# Altium PCB DiPho_AFE.PcbDoc (part 1 of 2)
Units mm, origin at the board's own origin, x right, y up, seen from the top; angles counter-clockwise.
Board outline 25.2 x 25.2 mm, 4 copper layers (Top Layer, Inner Layer 1, Inner Layer 2, Bottom Layer), stack 1.51 mm thick; 66 components, 49 nets, 237 pads, 102 vias.
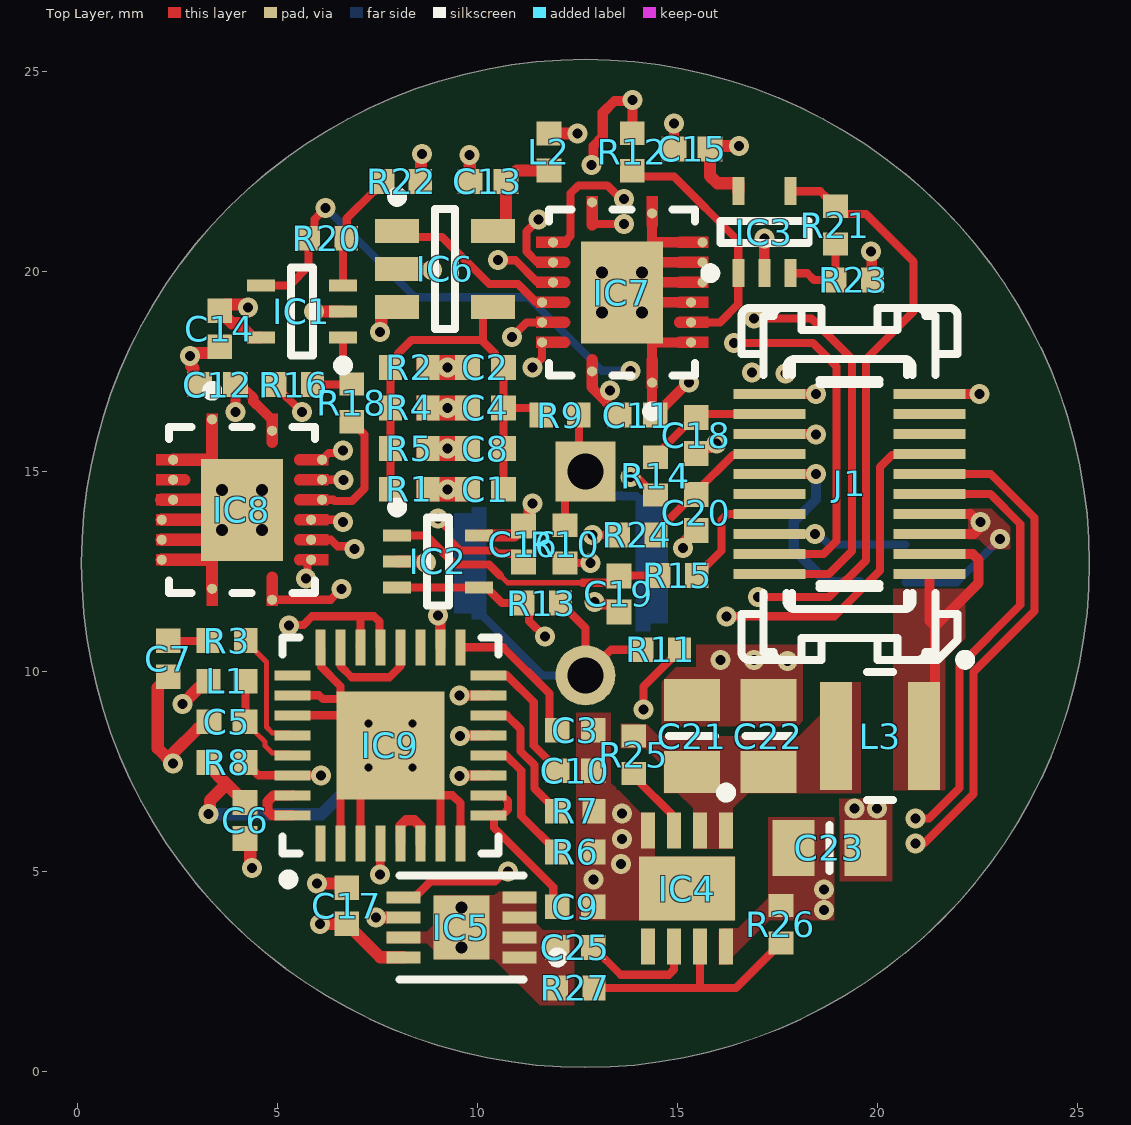
[diagram p0: Top Layer view]
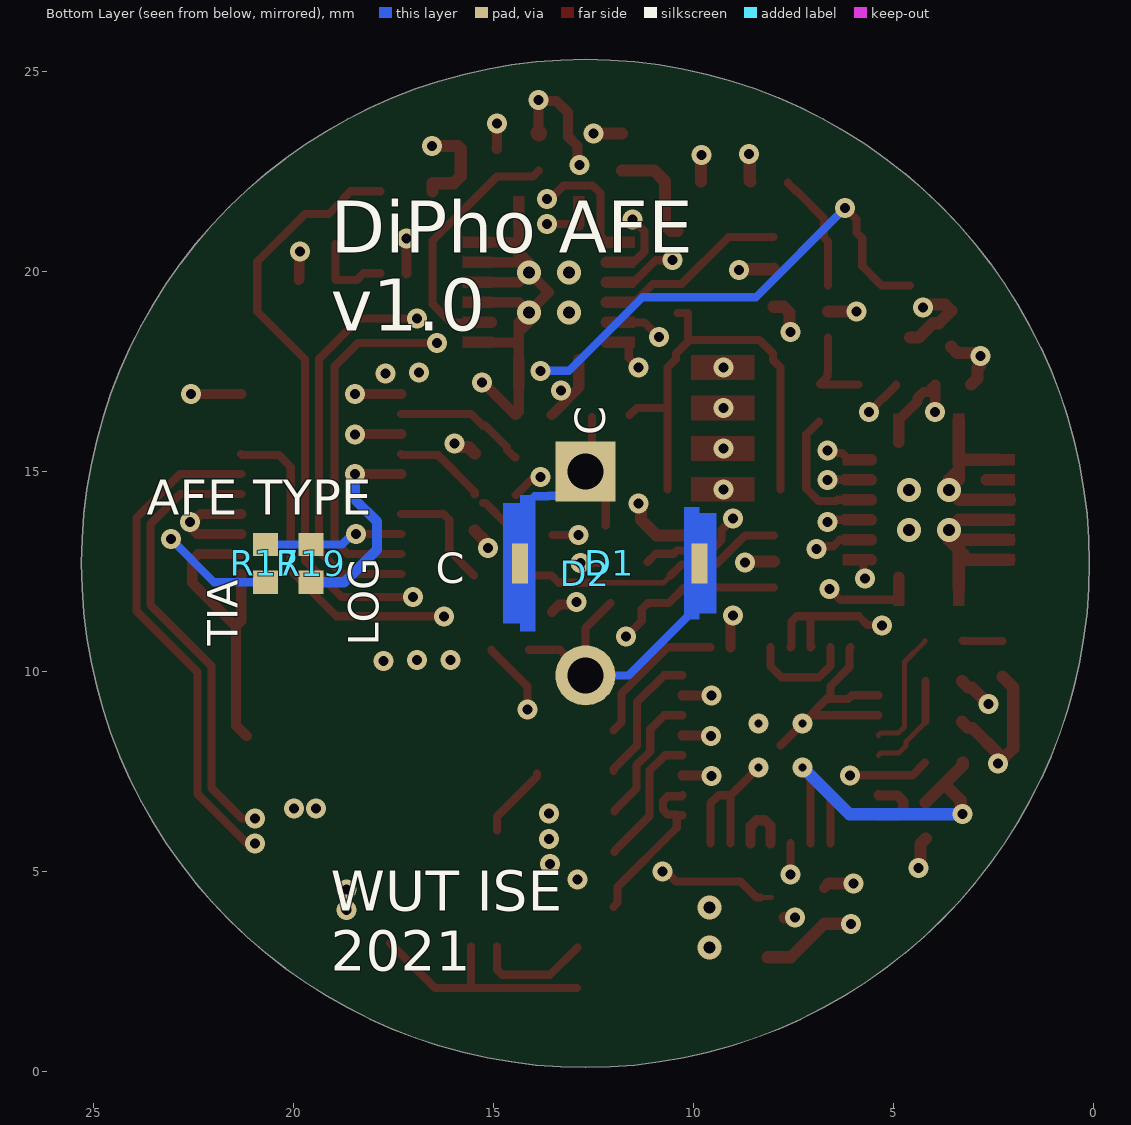
[diagram p1: Bottom Layer view, seen from below]
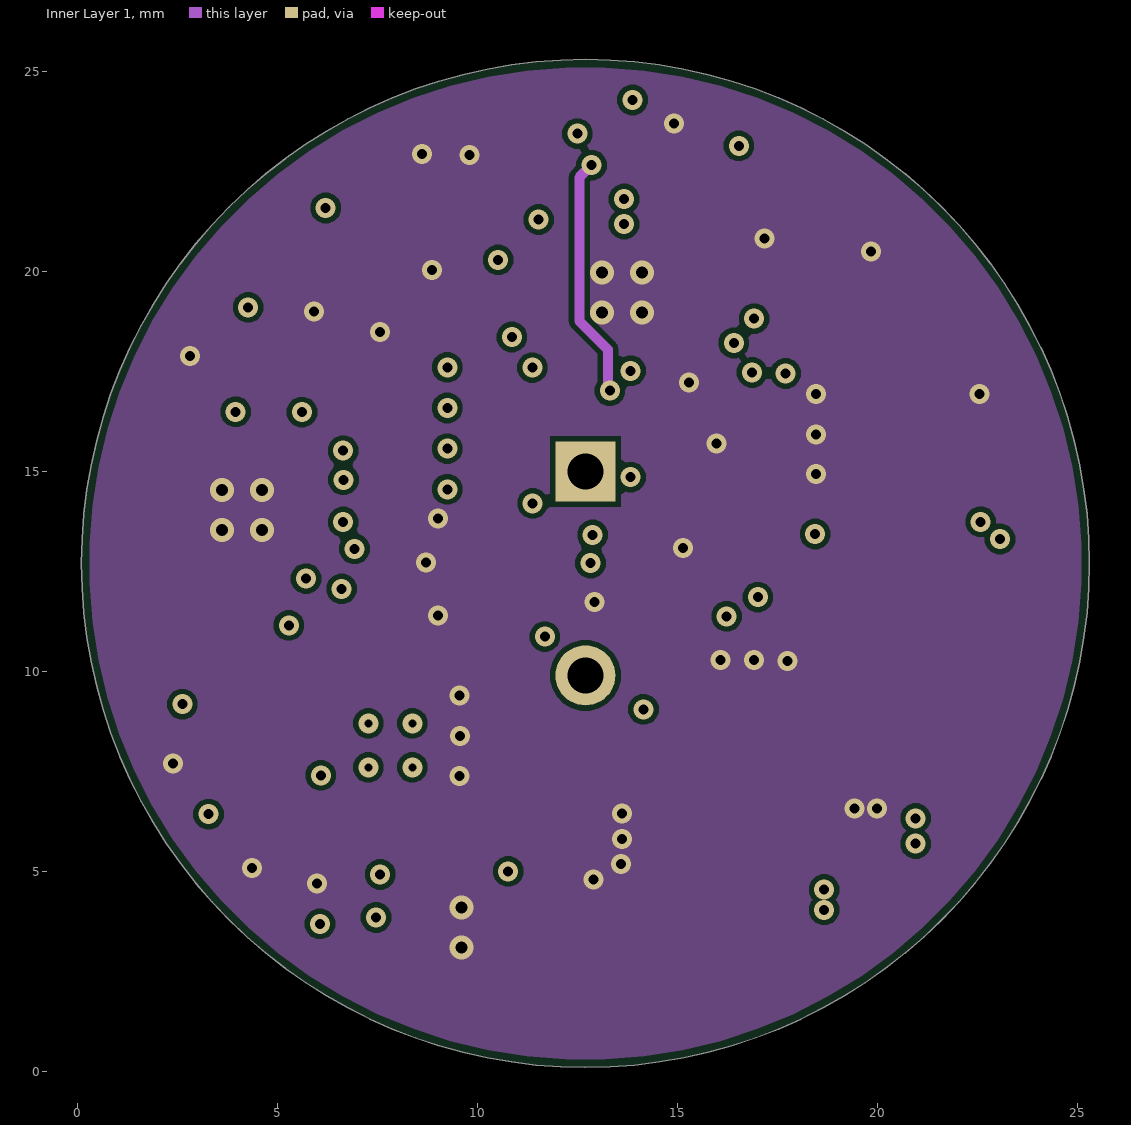
[diagram p2: Inner Layer 1]
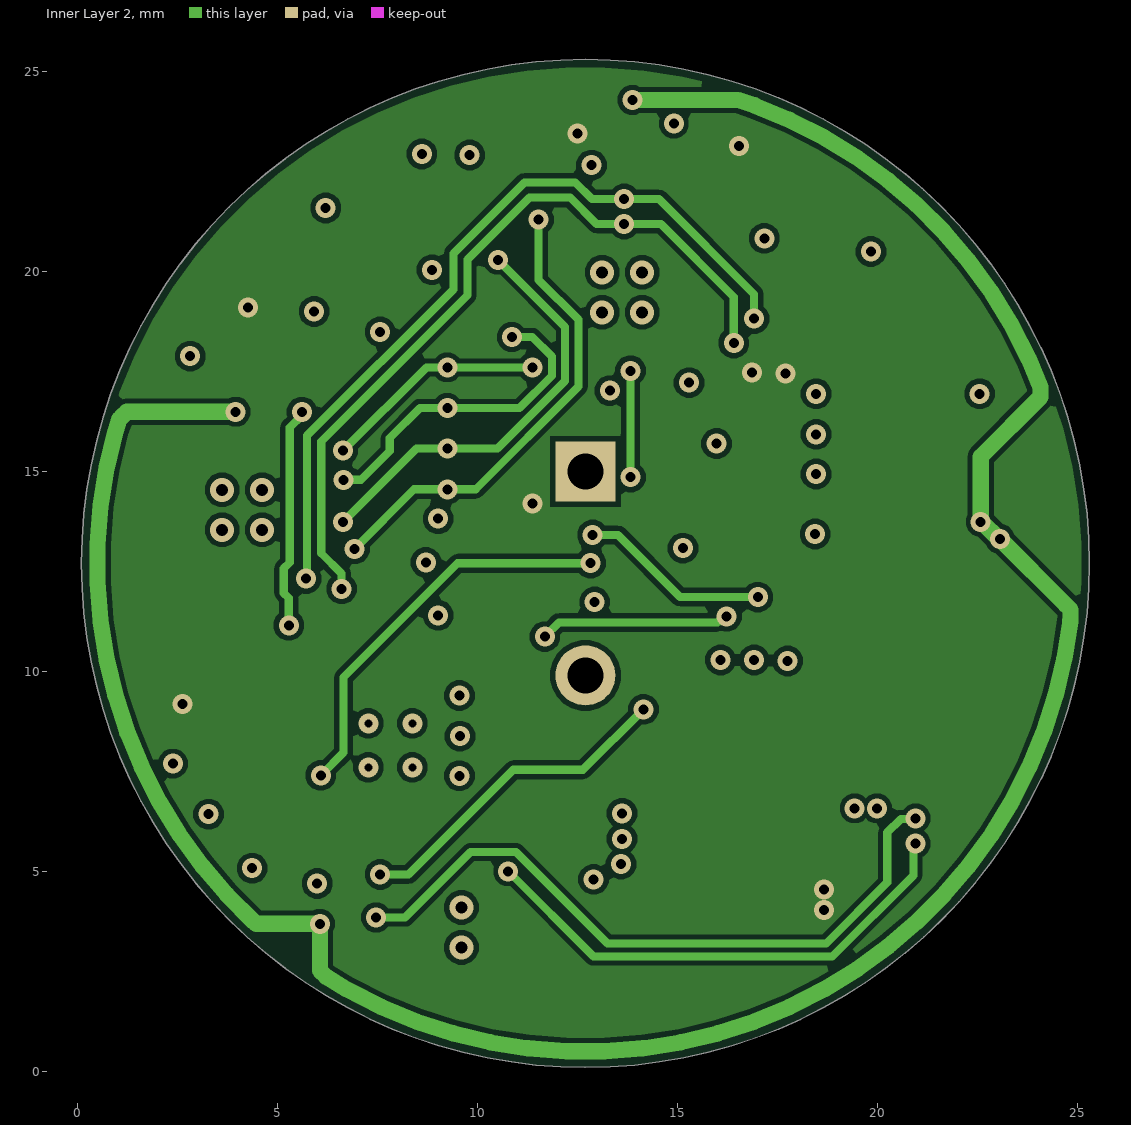
[diagram p3: Inner Layer 2]
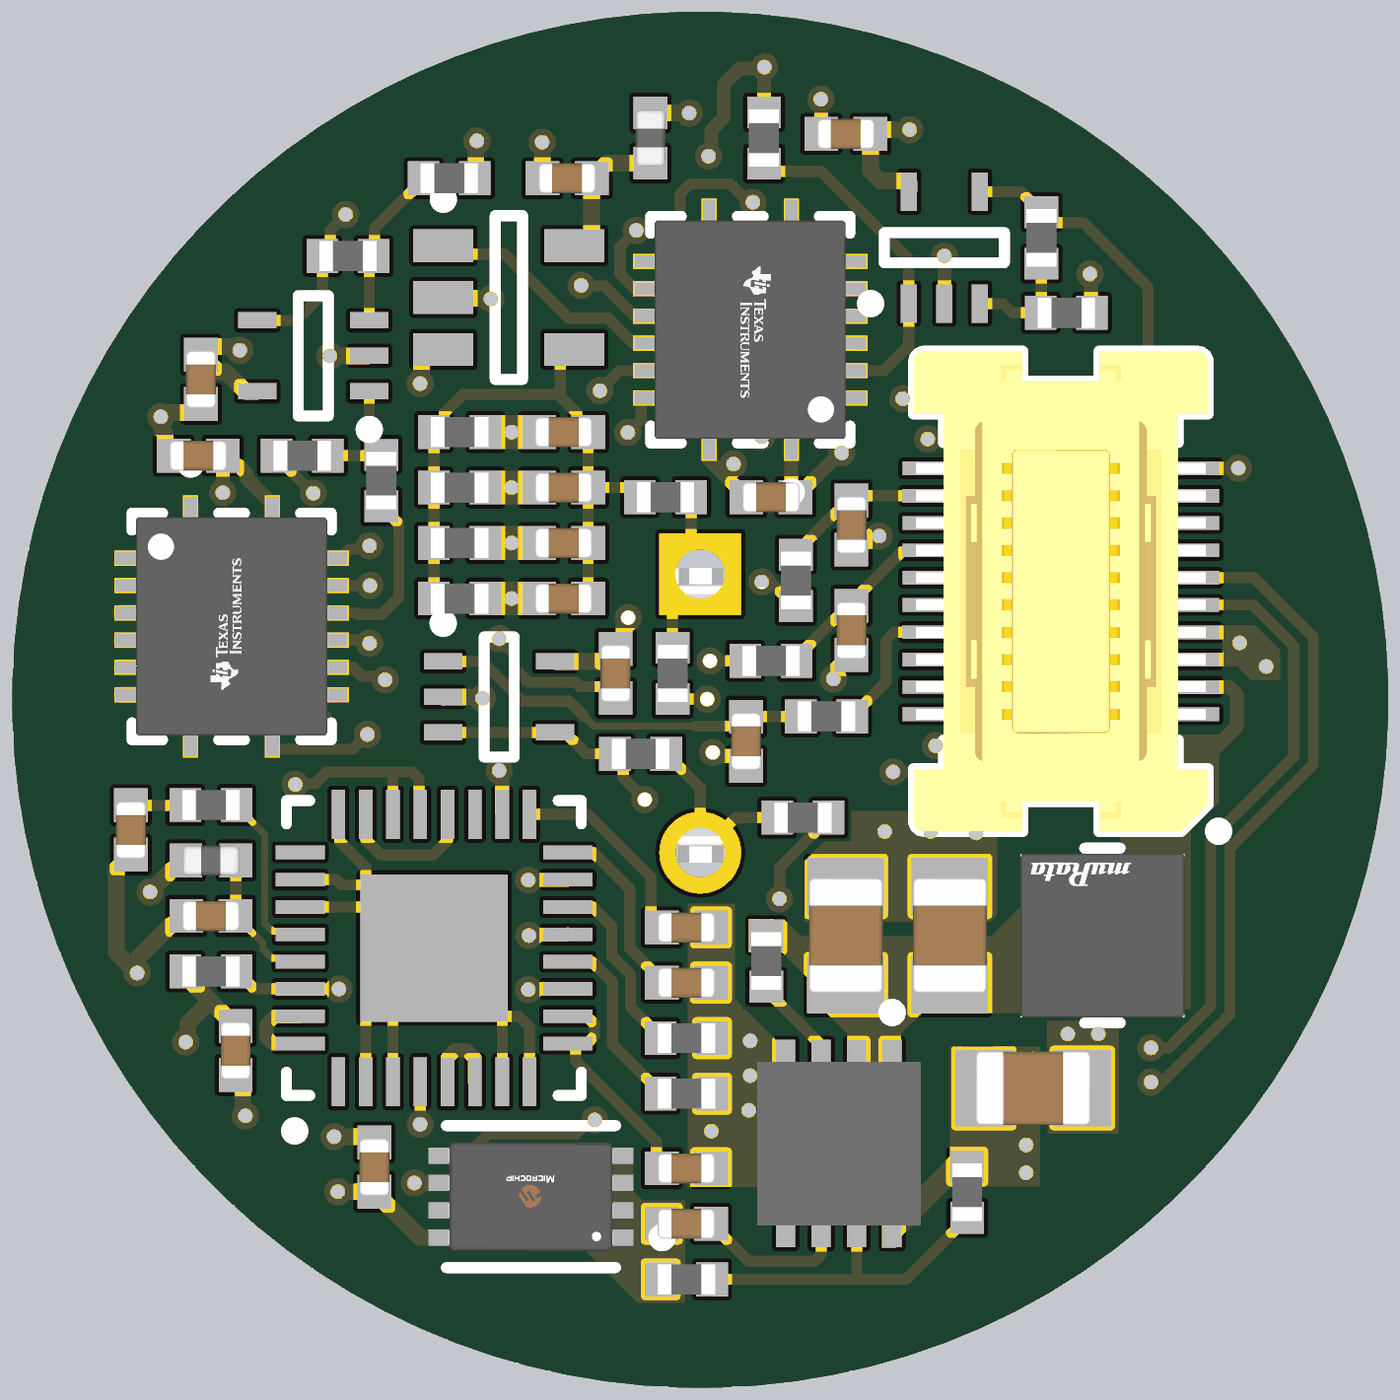
[diagram p4: 3D render of the assembled board from above, using the file's embedded part models]
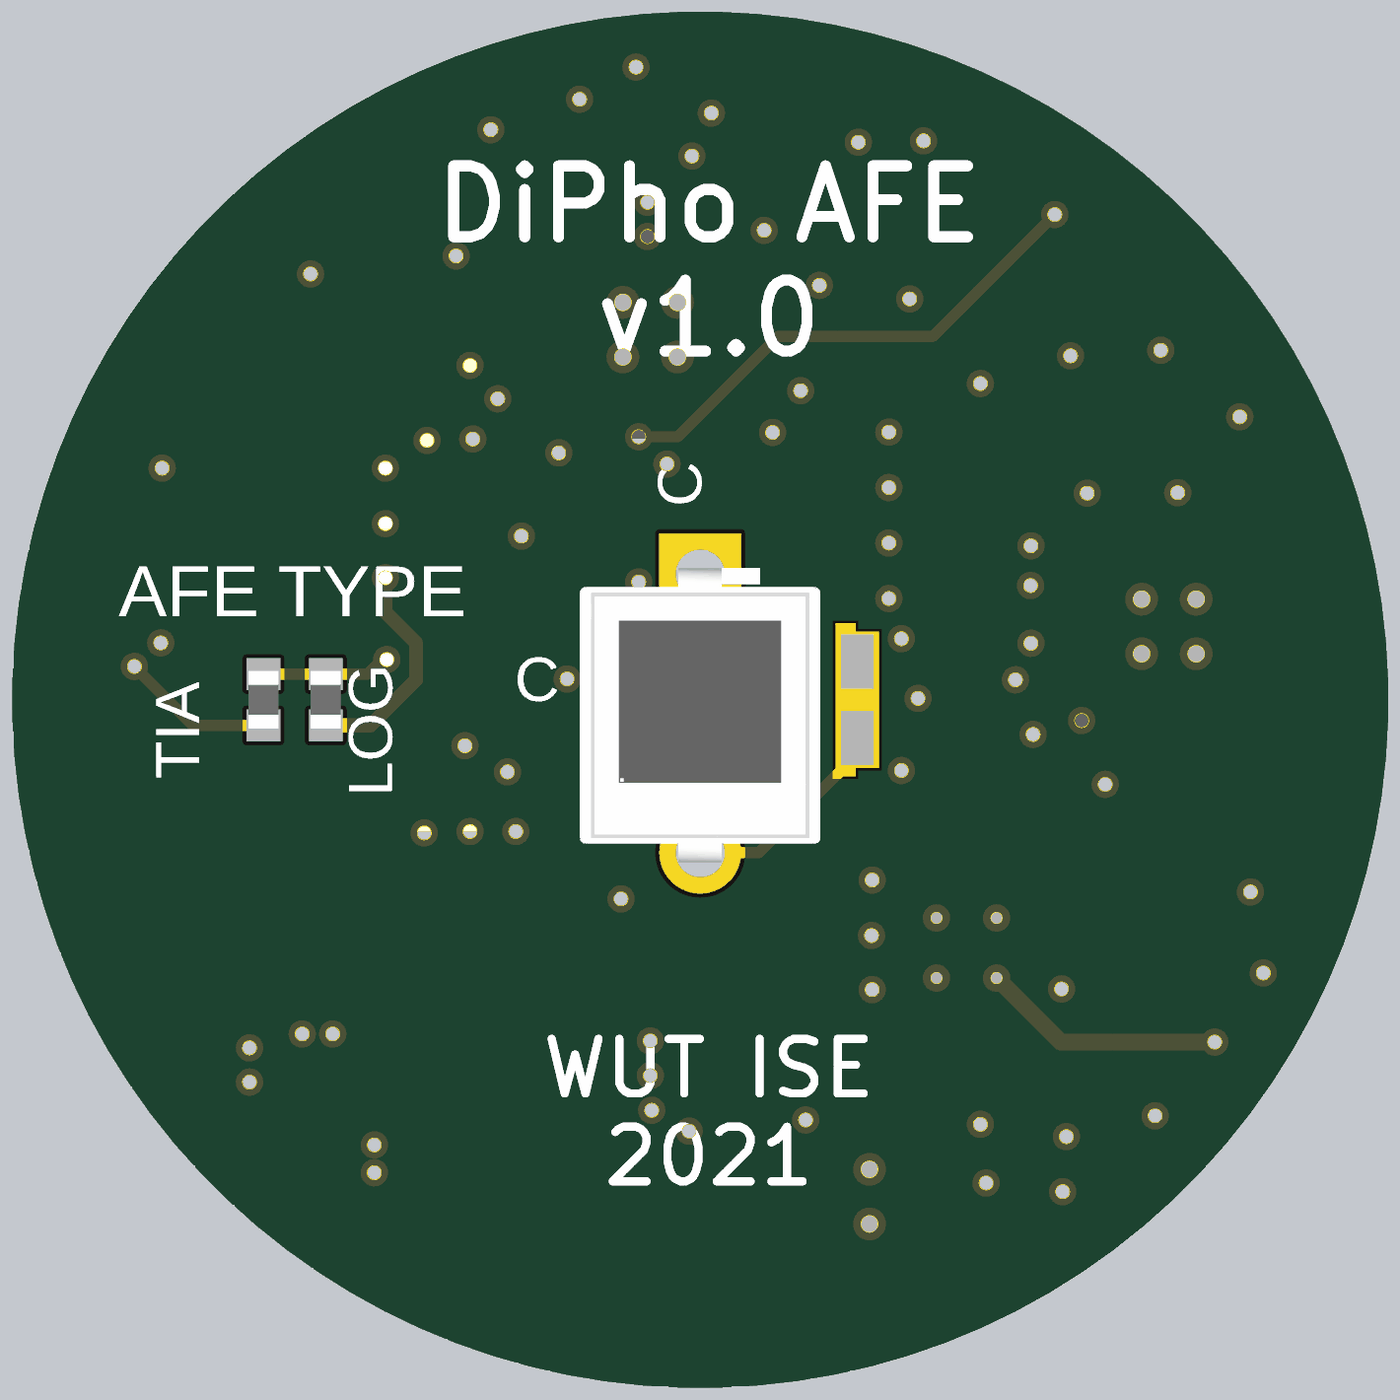
[diagram p5: 3D render of the assembled board from below, using the file's embedded part models]

## Layer stack, top to bottom
Top Solder: solder mask 0.0127, Solder Resist, Dk 3.8
Top Layer: signal copper 0.035
Dielectric 1: prepreg 0.22, PP-006, Dk 4.1
Inner Layer 1: signal copper 0.035
Dielectric: core 0.93, FR-4, Dk 4.5
Inner Layer 2: signal copper 0.035
Dielectric 2: prepreg 0.22, PP-006, Dk 4.1
Bottom Layer: signal copper 0.035
Bottom Solder: solder mask 0.0127, Solder Resist, Dk 3.8

## Board outline
12.7,0.1 cw(c12.7,12.7) 0.1,12.7 cw(c12.7,12.7) 12.7,25.3 cw(c12.7,12.7) 25.3,12.7 cw(c12.7,12.7)

## Design rules (kind name [scope] priority, off if disabled: settings)
AcuteAngle [All] p1: minimum=6.00000000000000E+0001 checktracksonly=FALSE
BoardOutlineClearance [All] p1: gap=0.2 ignorepadtopadclearanceinfootprint=FALSE
Clearance Clearance_ViaInPadThermal [IsPad and (InNet('NetC6_1') or InNet('GND') ) vs IsVia] p1: gap=0 ignorepadtopadclearanceinfootprint=TRUE except(-1: SMDPad-Via THPad-Via)
Clearance Clearance_ViaInPad [IsPad vs IsVia] p2: gap=0 ignorepadtopadclearanceinfootprint=TRUE except(0.001: SMDPad-Via THPad-Via)
Clearance [All] p3: gap=0.127 ignorepadtopadclearanceinfootprint=FALSE except(0.25: Arc-Hole Track-Hole SMDPad-Hole THPad-Hole Via-Hole Fill-Hole Poly-Hole Region-Hole Text-Hole)
ComponentClearance ComponentClearancePD [InComponent('D1') vs InComponent('D2')] p1: gap=-100 collisioncheckmode=3 verticalgap=-100 showdistances=FALSE
ComponentClearance [All] p2: gap=0.102 collisioncheckmode=3 verticalgap=0.102 showdistances=TRUE
DiffPairsRouting [All] p1: maxlimit=0.102 minlimit=0.102 mostfreqgap=0.102 toplayer_minwidth=0.102 toplayer_maxwidth=1816.048 toplayer_prefwidth=0.102 midlayer1_minwidth=0.102 midlayer1_maxwidth=1816.048 midlayer1_prefwidth=0.102 midlayer2_minwidth=0.102 midlayer2_maxwidth=1816.048 midlayer2_prefwidth=0.102 bottomlayer_minwidth=0.102 bottomlayer_maxwidth=1816.048 bottomlayer_prefwidth=0.102 maxuncoupledlength=12.7
Height [All] p1: minheight=0 maxheight=1816.048 prefheight=12.7
HoleSize [All] p1: absolutevalues=TRUE maxlimit=6.3 minlimit=0.2 maxpercent=80.000 minpercent=20.000
HoleToHoleClearance [All] p1: gap=0.25 allowstackedmicrovias=FALSE
MinimumAnnularRing [All] p1: minimumring=0.076
MinimumSolderMaskSliver [All] p1: minsoldermaskwidth=0
PlaneClearance [All] p1: clearance=0.102
PlaneConnect PlaneConnectPowerPads [InPadClass('PowerPads')] p1: planeconnectstyle=Direct reliefexpansion=0.508 reliefentries=4 reliefconductorwidth=0.254 reliefairgap=0.254
PlaneConnect [All] p2: pad.planeconnectstyle=Relief pad.reliefexpansion=0.3 pad.reliefentries=4 pad.reliefconductorwidth=0.102 pad.reliefairgap=0.102 via.planeconnectstyle=Direct via.reliefexpansion=0.3 via.reliefentries=4 via.reliefconductorwidth=0.127 via.reliefairgap=0.127
PolygonConnect PolygonConnectPowerPads [All vs (InPadClass('PowerPads'))] p1: connectstyle=Direct reliefconductorwidth=0.254 reliefentries=4 polygonreliefangle="90 Angle" airgapwidth=0.254
PolygonConnect [All] p2: thpad.connectstyle=Relief thpad.reliefconductorwidth=0.102 thpad.reliefentries=4 thpad.polygonreliefangle="90 Angle" thpad.airgapwidth=0.102 smdpad.connectstyle=Direct smdpad.reliefconductorwidth=0.102 smdpad.reliefentries=4 smdpad.polygonreliefangle="90 Angle" smdpad.airgapwidth=0.102 via.connectstyle=Direct via.reliefconductorwidth=0.127 via.reliefentries=4 via.polygonreliefangle="90 Angle" via.airgapwidth=0.127
RoutingVias [All] p1: holewidth=0.25 width=0.5 viastyle="Through Hole" minholewidth=0.25 minwidth=0.5 maxholewidth=6.3 maxwidth=6.55
SilkToSilkClearance [All] p1: silktosilkclearance=0
SilkToSolderMaskClearance [IsPad] p1: minsilkscreentomaskgap=0.001 clearancetoexposedcopper=TRUE
SolderMaskExpansion SolderMaskExpansionVia [IsVia] p1: expansion=0.075 istentingtop=TRUE
SolderMaskExpansion [All] p2: expansion=0.075 istentingtop=FALSE
Width [All] p1: maxlimit=1816.048 minlimit=0.127 preferedwidth=0.127
20 further rules are at their usual default settings.

## Classes and differential pairs
component class "LOG Amplifier": C3 C5 C6 C7 C9 C10 IC9 L1 R3 R6 R7 R8 R10 R11
component class "B2B Connector": J1 R17 R19
component class analog: C14 C15 C16 C17 C18 C19 C20 C21 C22 C23 C25 D1 D2 IC1 IC2 IC3 IC4 IC5 L3 R14 R15 R16 R18 R20 R21 R22 R23 R24 R25 R26 R27
component class "TI Amplifier": C1 C2 C4 C8 C11 C12 C13 IC6 IC7 IC8 L2 R1 R2 R4 R5 R9 R12 R13

## Components (designator, comment, footprint, x,y, rotation, side; value= is the part's Value field where it differs from the comment)
C1 "47nF" CAPC1005X55N 10.198,14.554 r180 top
C2 "4.7nF" CAPC1005X55N 10.198,17.602 r180 top
C3 "100nF" CAPC1005X55N 12.446,8.529 r180 top
C4 "470pF" CAPC1005X55N 10.198,16.586 r180 top
C5 "100nF" CAPC1005X55N 3.737,8.74 r0 top
C6 "100nF" CAPC1005X55N 4.191,6.274 r270 top
C7 "100nF" CAPC1005X55N 2.272,10.315 r270 top
C8 "47pF" CAPC1005X55N 10.198,15.57 r180 top
C9 "100nF" CAPC1005X55N 12.446,4.118 r180 top
C10 "100nF" CAPC1005X55N 12.446,7.518 r180 top
C11 "100nF" CAPC1005X55N 13.995,16.408 r180 top
C12 "100nF" CAPC1005X55N 3.505,17.17 r0 top
C13 "100nF" CAPC1005X55N 10.262,22.25 r0 top
C14 "100nF" CAPC1005X55N 3.556,18.567 r90 top
C15 "100nF" CAPC1005X55N 15.367,23.063 r0 top
C16 "100nF" CAPC1005X55N 11.151,13.183 r90 top
C17 "100nF" CAPC1005X55N 6.731,4.14 r270 top
C18 "10nF" CAPC1005X55N 15.469,15.9 r90 top
C19 "680nF" CAPC1005X55N 13.538,11.938 r90 top
C20 "10nF" CAPC1005X55N 15.469,13.97 r90 top
C21 "10uF" CAPC2012X135N 15.367,8.382 r270 top
C22 "10uF" CAPC2012X135N 17.272,8.382 r270 top
C23 "10uF" CAPC2012X135N 18.796,5.588 r180 top
C25 "1nF" CAPC1005X55N 12.446,3.102 r0 top
D1 "SFH2201" SFH_2201 12.09,12.7 r180 bottom locked
D2 "BPW34" BPW34 12.7,9.9 r90 bottom locked
IC1 "LMV321SQ3T2G" ONSC-SC70-5-419A-02_K_N 5.613,18.999 r180 top
IC2 "LMV321SQ3T2G" ONSC-SC70-5-419A-02_K_N 9.017,12.751 r0 top
IC3 "LMV321SQ3T2G" ONSC-SC70-5-419A-02_K_N 17.17,20.98 r90 top
IC4 "MCP1726-ADJE/MF" SON65P300X300X100-9N-R160X240 15.24,4.572 r270 top
IC5 "AT24MAC402-MAHM-T" FP-C04-21355-Q4B-MFG 9.6,3.6 r180 top
IC6 "AD8541ARTZ-REEL7" ADI-RJ-5_N 9.195,20.066 r0 top
IC7 "SN74LV4052ARGYR" FP-RGY0016A-MFG 13.617,19.478 r90 top
IC8 "SN74LV4052ARGYR" FP-RGY0016A-MFG 4.117,14.042 r270 top
IC9 "ADL5304ACPZ-R7" LFCSP32 7.823,8.153 r90 top
J1 "SlimStack™" MOLEX_52991-0208 19.304,14.686 r90 top locked
L1 "600R@100MHz" INDC1005X55N 3.737,9.756 r180 top
L2 "600R@100MHz" INDC1005X55N 11.786,22.987 r270 top
L3 "56uH" FP-LQH3NPH_ME-MFG 20.066,8.382 r180 top
R1 "294" RESC1005X40N 8.293,14.554 r0 top value=10k
R2 "3k09" RESC1005X40N 8.293,17.602 r0 top value=10k
R3 "4R02" RESC1005X40N 3.737,10.772 r0 top
R4 "3k24" RESC1005X40N 8.293,16.586 r0 top value=10k
R5 "324k" RESC1005X40N 8.293,15.57 r0 top value=10k
R6 "1k" RESC1005X40N 12.446,5.486 r0 top
R7 "1k" RESC1005X40N 12.446,6.502 r0 top
R8 "49R9" RESC1005X40N 3.737,7.724 r180 top
R9 "0" RESC1005X40N 12.065,16.408 r180 top
R10 "0" RESC1005X40N 12.192,13.183 r270 top
R11 "0" RESC1005X40N 14.58,10.541 r0 top
R12 "6k65" RESC1005X40N 13.868,22.987 r270 top value=10k
R13 "0" RESC1005X40N 11.608,11.709 r180 top
R14 "470" RESC1005X40N 14.453,14.884 r90 top
R15 "470" RESC1005X40N 15.011,12.395 r180 top
R16 "0" RESC1005X40N 5.41,17.17 r0 top
R17 "10k" RESC1005X40N 20.701,12.7 r270 bottom
R18 "0" RESC1005X40N 6.858,16.713 r90 top
R19 "10k" RESC1005X40N 19.558,12.7 r90 bottom
R20 "3k16" RESC1005X35N 6.248,20.828 r180 top value=10k
R21 "33k2" RESC1005X40N 18.948,21.158 r90 top
R22 "10k" RESC1005X35N 8.103,22.25 r180 top
R23 "1k15" RESC1005X35N 19.406,19.787 r180 top value=10k
R24 "470" RESC1005X40N 13.995,13.411 r0 top
R25 "10k" RESC1005X40N 13.908,7.915 r270 top
R26 "11k5" RESC1005X40N 17.589,3.681 r90 top
R27 "1k1" RESC1005X40N 12.446,2.086 r180 top

## Footprints (in the part's own frame and the unit in brackets; to place one, negate y for a bottom-side part, rotate by r counter-clockwise, add the part's x,y. Pads: shape width x height; smd on the part's side, far side on the other; paste and mask are expansions set on the pad)
ADI-RJ-5_N [mm] "SOT-23, 5-Leads, Body 2.9x1.6mm, Pitch 0.95mm, IPC Medium Density"
  rect 1.1x0.6 smd: 1(-1.2,0.95) 2(-1.2,0) 3(-1.2,-0.95) 4(1.2,-0.95) 5(1.2,0.95)
  silkscreen extent -1.32,-1.5 0.25,1.92, body extent -0.85,-1.5 0.85,1.5, height 1.45
BPW34 [mm]
  round 1.5 hole 0.9: A(0,0)
  rect 1.5x1.5 hole 0.9: C(5.1,0)
  body extent -0.19,-2.2 5.21,2.2, height 1.74
CAPC1005X55N [mm] "Capacitor, Non-Polarized, Chip; 1.00mm L X 0.50mm W X 0.70mm H, IPC Medium Density"
  rect 0.62x0.62 smd: 1(-0.45,0) 2(0.45,0)
  body extent -0.52,-0.27 0.53,0.28, height 0.55
CAPC2012X135N [mm] "Chip Capacitor, Body 2.0x1.25mm, IPC Medium Density"
  rect 1.05x1.4 smd: 1(-0.9,0) 2(0.9,0)
  silkscreen extent 0,-0.58 0,0.58, body extent -1.05,-0.67 1.05,0.68, height 1.25
FP-C04-21355-Q4B-MFG [mm]
  rect 0.85x0.3 smd paste+0 mask+0: 1(-1.45,0.75) 2(-1.45,0.25) 3(-1.45,-0.25) 4(-1.45,-0.75) 5(1.45,-0.75) 6(1.45,-0.25) 7(1.45,0.25) 8(1.45,0.75)
  rect 1.4x1.6 smd paste+0 mask+0: 9(0,0)
  silkscreen extent -2.53,-1.3 1.55,1.3, body extent -1.97,-1.15 1.97,1.15, height 0.25
FP-LQH3NPH_ME-MFG [mm]
  rect 0.8x2.7 smd paste+0 mask+0: 1(-1.1,0) 2(1.1,0)
  silkscreen extent -0.33,-1.6 0.33,1.6, body extent -1.7,-1.7 1.7,1.7, height 0.25
FP-RGY0016A-MFG [mm]
  round 0.252 smd paste-1000 mask+0: 1(-2.26,-0.75) 2(-1.25,-1.725) 3(-0.75,-1.725) 4(-0.25,-1.725) 5(0.25,-2.01) 6(0.75,-2.01) 7(1.25,-2.01) 8(1.975,-0.75) 9(2.25,0.75) 10(1.25,1.725) 11(0.75,1.725) 12(0.25,1.725) 13(-0.25,2) 14(-0.75,2) 15(-1.25,2) 16(-1.975,0.75)
  rect 2.55x2.05 smd paste-1000 mask+0: 17(0,0)
  Top Layer region: -2.4,0.89 -1.69,0.89 -1.636,0.879 -1.591,0.849 -1.561,0.804 -1.55,0.75 -1.55,0.75 -1.561,0.696 -1.591,0.651 -1.636,0.621 -1.69,0.61 -1.69,0.61 -2.4,0.61
  Top Layer region: 2.4,0.61 1.69,0.61 1.636,0.621 1.591,0.651 1.561,0.696 1.55,0.75 1.55,0.75 1.561,0.804 1.591,0.849 1.636,0.879 1.69,0.89 1.69,0.89 2.4,0.89
  Top Layer region: 2.4,-0.89 1.69,-0.89 1.636,-0.879 1.591,-0.849 1.561,-0.804 1.55,-0.75 1.55,-0.75 1.561,-0.696 1.591,-0.651 1.636,-0.621 1.69,-0.61 1.69,-0.61 2.4,-0.61
  Top Layer region: -2.4,-0.61 -1.69,-0.61 -1.636,-0.621 -1.591,-0.651 -1.561,-0.696 -1.55,-0.75 -1.55,-0.75 -1.561,-0.804 -1.591,-0.849 -1.636,-0.879 -1.69,-0.89 -1.69,-0.89 -2.4,-0.89
  Top Layer region: -1.11,2.15 -1.11,1.44 -1.121,1.386 -1.151,1.341 -1.196,1.311 -1.25,1.3 -1.25,1.3 -1.304,1.311 -1.349,1.341 -1.379,1.386 -1.39,1.44 -1.39,1.44 -1.39,2.15
  Top Layer region: -0.61,2.15 -0.61,1.44 -0.621,1.386 -0.651,1.341 -0.696,1.311 -0.75,1.3 -0.75,1.3 -0.804,1.311 -0.849,1.341 -0.879,1.386 -0.89,1.44 -0.89,1.44 -0.89,2.15
  Top Layer region: -0.11,2.15 -0.11,1.44 -0.121,1.386 -0.151,1.341 -0.196,1.311 -0.25,1.3 -0.25,1.3 -0.304,1.311 -0.349,1.341 -0.379,1.386 -0.39,1.44 -0.39,1.44 -0.39,2.15
  Top Layer region: 0.39,2.15 0.39,1.44 0.379,1.386 0.349,1.341 0.304,1.311 0.25,1.3 0.25,1.3 0.196,1.311 0.151,1.341 0.121,1.386 0.11,1.44 0.11,1.44 0.11,2.15
  Top Layer region: 0.89,2.15 0.89,1.44 0.879,1.386 0.849,1.341 0.804,1.311 0.75,1.3 0.75,1.3 0.696,1.311 0.651,1.341 0.621,1.386 0.61,1.44 0.61,1.44 0.61,2.15
  Top Layer region: 1.39,2.15 1.39,1.44 1.379,1.386 1.349,1.341 1.304,1.311 1.25,1.3 1.25,1.3 1.196,1.311 1.151,1.341 1.121,1.386 1.11,1.44 1.11,1.44 1.11,2.15
  Top Layer region: 1.11,-2.15 1.11,-1.44 1.121,-1.386 1.151,-1.341 1.196,-1.311 1.25,-1.3 1.25,-1.3 1.304,-1.311 1.349,-1.341 1.379,-1.386 1.39,-1.44 1.39,-1.44 1.39,-2.15
  Top Layer region: 0.61,-2.15 0.61,-1.44 0.621,-1.386 0.651,-1.341 0.696,-1.311 0.75,-1.3 0.75,-1.3 0.804,-1.311 0.849,-1.341 0.879,-1.386 0.89,-1.44 0.89,-1.44 0.89,-2.15
  Top Layer region: 0.11,-2.15 0.11,-1.44 0.121,-1.386 0.151,-1.341 0.196,-1.311 0.25,-1.3 0.25,-1.3 0.304,-1.311 0.349,-1.341 0.379,-1.386 0.39,-1.44 0.39,-1.44 0.39,-2.15
  Top Layer region: -0.39,-2.15 -0.39,-1.44 -0.379,-1.386 -0.349,-1.341 -0.304,-1.311 -0.25,-1.3 -0.25,-1.3 -0.196,-1.311 -0.151,-1.341 -0.121,-1.386 -0.11,-1.44 -0.11,-1.44 -0.11,-2.15
  Top Layer region: -0.89,-2.15 -0.89,-1.44 -0.879,-1.386 -0.849,-1.341 -0.804,-1.311 -0.75,-1.3 -0.75,-1.3 -0.696,-1.311 -0.651,-1.341 -0.621,-1.386 -0.61,-1.44 -0.61,-1.44 -0.61,-2.15
  Top Layer region: -1.39,-2.15 -1.39,-1.44 -1.379,-1.386 -1.349,-1.341 -1.304,-1.311 -1.25,-1.3 -1.25,-1.3 -1.196,-1.311 -1.151,-1.341 -1.121,-1.386 -1.11,-1.44 -1.11,-1.44 -1.11,-2.15
  silkscreen extent -3.1,-1.83 2.07,1.83, body extent -2.5,-2.25 2.5,2.25, height 0.25
INDC1005X55N [mm] "Chip Inductor, 2-Leads, EIA 0402, Metric 1005, Body 1x0.5mm, 0402IPC Medium Density"
  rect 0.6x0.62 smd: 1(-0.46,0) 2(0.46,0)
  body extent -0.52,-0.27 0.53,0.28, height 0.55
LFCSP32 [mm] "QFN, 32-Leads, Body 5,00x5,00mm, Pitch 0,50mm, Thermal Pad 2,70x2,70mm, IPC Medium Density"
  rect 0.9x0.25 smd: 1(-2.45,1.75) 2(-2.45,1.25) 3(-2.45,0.75) 4(-2.45,0.25) 5(-2.45,-0.25) 6(-2.45,-0.75) 7(-2.45,-1.25) 8(-2.45,-1.75) 17(2.45,-1.75) 18(2.45,-1.25) 19(2.45,-0.75) 20(2.45,-0.25) 21(2.45,0.25) 22(2.45,0.75) 23(2.45,1.25) 24(2.45,1.75)
  rect 0.25x0.9 smd: 9(-1.75,-2.45) 10(-1.25,-2.45) 11(-0.75,-2.45) 12(-0.25,-2.45) 13(0.25,-2.45) 14(0.75,-2.45) 15(1.25,-2.45) 16(1.75,-2.45) 25(1.75,2.45) 26(1.25,2.45) 27(0.75,2.45) 28(0.25,2.45) 29(-0.25,2.45) 30(-0.75,2.45) 31(-1.25,2.45) 32(-1.75,2.45)
  rect 2.7x2.7 smd: 33(0,0)
  silkscreen extent -3.47,-2.7 2.7,2.7, body extent -2.55,-2.55 2.55,2.55, height 0.8
MOLEX_52991-0208 [mm] "0.50mm Pitch SlimStack™ Dual Row 20 Circuits Surface Mount Vertical Receptacle (3.00 and 4.00mm Stacking Heights)"
  rect 0.25x1.8 smd: 1(-2.25,-2) 2(-2.25,2) 3(-1.75,-2) 4(-1.75,2) 5(-1.25,-2) 6(-1.25,2) 7(-0.75,-2) 8(-0.75,2) 9(-0.25,-2) 10(-0.25,2) 11(0.25,-2) 12(0.25,2) 13(0.75,-2) 14(0.75,2) 15(1.25,-2) 16(1.25,2) 17(1.75,-2) 18(1.75,2) 19(2.25,-2) 20(2.25,2)
  silkscreen extent -4.52,-3.01 4.4,2.7, body extent -4.4,-2.7 4.4,2.7, height 2.3
ONSC-SC70-5-419A-02_K_N [mm] "SOT23, 5-Leads, Body 2.2x1.35mm, Pitch 0.65mm, IPC Medium Density"
  rect 0.7x0.3 smd: 1(-1.025,0.65) 2(-1.025,0) 3(-1.025,-0.65) 4(1.025,-0.65) 5(1.025,0.65)
  silkscreen extent -1.15,-1.1 0.28,1.47, body extent -0.67,-1.1 0.67,1.1, height 1.1
RESC1005X35N [mm] "Chip Resistor, EIA 0402, Metric 1005, Body 1.0x0.5mm, IPC Medium Density"
  rect 0.58x0.62 smd: 1(-0.47,0) 2(0.47,0)
  body extent -0.52,-0.27 0.53,0.28, height 0.35
RESC1005X40N [mm] "Chip Resistor, EIA 0402, Metric 1005, Body 1.0x0.5mm, IPC Medium Density"
  rect 0.58x0.62 smd: 1(-0.47,0) 2(0.47,0)
  body extent -0.52,-0.27 0.53,0.28, height 0.4
SFH_2201 [mm]
  rect 0.4x1 smd paste-1 mask+0: A(2.24,0) C(-2.24,0)
  Top Layer region: -1.865,-1.7 -2.235,-1.7 -2.235,-1.5 -2.665,-1.5 -2.665,0 -2.665,1.5 -2.235,1.5 -2.235,1.7 -1.865,1.7
  Top Layer region: 2.235,1.25 2.665,1.25 2.665,-1.25 2.235,-1.25 2.235,-1.4 1.865,-1.4 1.865,1.4 2.235,1.4
  body extent -2.55,-2 2.54,2, height 0.85
SON65P300X300X100-9N-R160X240 [mm] "SON, 0.65mm pitch, 8 pin, 3mm X 3mm X 1.00mm H body (w/thermal tab 1.60 X 2.4mm),  IPC Medium Density"
  rect 0.9x0.35 smd: 1(-1.45,0.975) 2(-1.45,0.325) 3(-1.45,-0.325) 4(-1.45,-0.975) 5(1.45,-0.975) 6(1.45,-0.325) 7(1.45,0.325) 8(1.45,0.975)
  rect 1.6x2.4 smd: 9(0,0)
  silkscreen extent -2.52,0.85 -2.28,1.1, body extent -1.5,-1.5 1.5,1.5, height 1

## Part data
C1: library part CC0402_47NF_16V_10%_X7R, "Non-polarised capacitor", Case=0402, Manufacturer=GENERIC, Manufacturer1 ComponentHeight=0.55mm, Manufacturer1 Example=PHYCOMP, Manufacturer1 Part Number=223878715645, Tolerance=±10%, Voltage=16V, Author="CERN DEM JLC", Component Type=Standard, CreateDate=03.12.2007, HelpURL=\\cern.ch\dfs\Applications\Altium\Datasheets\CC0402_X7R_PHYCOMP.pdf, LatestRevisionDate=03.12.2007, Manufacturer Part Number=CC0402_47NF_16V_10%_X7R, Mounted=Yes, Part Description="SMD Multilayer Chip Ceramic Capacitor", Part Number=CC0402_47NF_16V_10%_X7R, Pin Count=2, Sense=No, SMD=Yes, Socket=No, Status="Not Recommended", TC=X7R
C2: library part CC0402_4.7NF_16V_10%_X7R, "Non-polarised capacitor", Case=0402, Manufacturer=GENERIC, Manufacturer1 ComponentHeight=0.55mm, Manufacturer1 Example=PHYCOMP, Manufacturer1 Part Number=223878715632, Tolerance=±10%, Voltage=16V, Author="CERN DEM JLC", Component Type=Standard, CreateDate=03.12.2007, HelpURL=\\cern.ch\dfs\Applications\Altium\Datasheets\CC0402_X7R_PHYCOMP.pdf, LatestRevisionDate=03.12.2007, Manufacturer Part Number=CC0402_4.7NF_16V_10%_X7R, Mounted=Yes, Part Description="SMD Multilayer Chip Ceramic Capacitor", Part Number=CC0402_4.7NF_16V_10%_X7R, Pin Count=2, Sense=No, SMD=Yes, Socket=No, Status="Not Recommended", TC=X7R
C3 C5 C6 C7 C9 C10 C11 C12 C13 C14 C15 C16 C17: library part CC0402_100NF_16V_10%_X7R, "Non-polarised capacitor", Case=0402, Manufacturer=GENERIC, Manufacturer1 ComponentHeight=0.55mm, Manufacturer1 Example=MURATA, Manufacturer1 Part Number=GRM155R71C104KA88D, Tolerance=±10%, Voltage=16V, Author="CERN DEM JLC", Component Type=Standard, CreateDate=05.12.2013, HelpURL=\\cern.ch\dfs\Applications\Altium\Datasheets\CC0402_X7R_MURATA_GRM.pdf, LatestRevisionDate=03.12.2007, Manufacturer Part Number=CC0402_100NF_16V_10%_X7R, Mounted=Yes, Part Description="SMD Multilayer Chip Ceramic Capacitor", Part Number=CC0402_100NF_16V_10%_X7R, Pin Count=2, Sense=No, SMD=Yes, Socket=No, Status="Not Recommended", TC=X7R
C4: library part CC0402_470PF_50V_10%_X7R, "Non-polarised capacitor", Case=0402, Manufacturer=GENERIC, Manufacturer1 ComponentHeight=0.55mm, Manufacturer1 Example=PHYCOMP, Manufacturer1 Part Number=223858715618, Tolerance=±10%, Voltage=50V, Author="CERN DEM JLC", Component Type=Standard, CreateDate=03.12.2007, HelpURL=\\cern.ch\dfs\Applications\Altium\Datasheets\CC0402_NP0_PHYCOMP.pdf, LatestRevisionDate=03.12.2007, Manufacturer Part Number=CC0402_470PF_50V_10%_X7R, Mounted=Yes, Part Description="SMD Multilayer Chip Ceramic Capacitor", Part Number=CC0402_470PF_50V_10%_X7R, Pin Count=2, Sense=No, SMD=Yes, Socket=No, Status="Not Recommended", TC=X7R
C8: library part CC0402_47PF_50V_5%_C0G, "Non-polarised capacitor", Case=0402, Manufacturer=GENERIC, Manufacturer1 ComponentHeight=0.55mm, Manufacturer1 Example=KEMET, Manufacturer1 Part Number=C0402C470J5GACTU, Tolerance=±5%, Voltage=50V, Author="CERN DEM JLC", Component Type=Standard, CreateDate=03.12.2007, HelpURL="\\cern.ch\dfs\Applications\Altium\Datasheets\CC0402_C0G_KEMET_(Commercial Grade).pdf", LatestRevisionDate=22.04.2015, Manufacturer Part Number=CC0402_47PF_50V_5%_C0G, Mounted=Yes, Part Description="SMD Multilayer Chip Ceramic Capacitor", Part Number=CC0402_47PF_50V_5%_C0G, Pin Count=2, Sense=No, SMD=Yes, Socket=No, Status=Preferred, TC=C0G/NP0
C18 C20: library part CC0402_10NF_16V_10%_X7R, "Non-polarised capacitor", Case=0402, Manufacturer=GENERIC, Manufacturer1 ComponentHeight=0.55mm, Manufacturer1 Example=PHYCOMP, Manufacturer1 Part Number=223878715636, Tolerance=±10%, Voltage=16V, Author="CERN DEM JLC", Component Type=Standard, CreateDate=03.12.2007, HelpURL=\\cern.ch\dfs\Applications\Altium\Datasheets\CC0402_X7R_PHYCOMP.pdf, LatestRevisionDate=03.12.2007, Manufacturer Part Number=CC0402_10NF_16V_10%_X7R, Mounted=Yes, Part Description="SMD Multilayer Chip Ceramic Capacitor", Part Number=CC0402_10NF_16V_10%_X7R, Pin Count=2, Sense=No, SMD=Yes, Socket=No, Status="Not Recommended", TC=X7R
C19: library part CC0402_680NF_10V_10%_X5R, "Non-polarised capacitor", Case=0402, Manufacturer=GENERIC, Manufacturer1 ComponentHeight=0.55mm, Manufacturer1 Example=MURATA, Manufacturer1 Part Number=GRM155R61A684KE15, Tolerance=±10%, Voltage=10V, Author="CERN DEM BC", Component Type=Standard, CreateDate=19.04.2021, HelpURL=\\cern.ch\dfs\Applications\Altium\Datasheets\CC0402_X5R_MURATA_GRM.pdf, LatestRevisionDate=19.04.2021, Manufacturer Part Number=CC0402_680NF_10V_10%_X5R, Mounted=Yes, Part Description="SMD Multilayer Chip Ceramic Capacitor", Part Number=CC0402_680NF_10V_10%_X5R, Pin Count=2, Sense=No, SMD=Yes, Socket=No, Status=None, TC=X5R
C21 C22 C23: library part CC0805_10UF_10V_10%_X7R, "Non-polarised capacitor", Case=0805, Manufacturer=GENERIC, Manufacturer1 ComponentHeight=1.35mm, Manufacturer1 Example=MURATA, Manufacturer1 Part Number=GRM21BR71A106KE51L, Tolerance=±10%, Voltage=10V, Author="CERN DEM JLC", Component Type=Standard, CreateDate=30.04.2012, HelpURL=\\cern.ch\dfs\Applications\Altium\Datasheets\CC0805_X7R_MURATA.pdf, LatestRevisionDate=30.04.2012, Manufacturer Part Number=CC0805_10UF_10V_10%_X7R, Mounted=Yes, Part Description="SMD Multilayer Chip Ceramic Capacitor", Part Number=CC0805_10UF_10V_10%_X7R, Pin Count=2, Sense=No, SMD=Yes, Socket=No, Status=Preferred, TC=X7R
C25: library part CC0402_1NF_50V_10%_X7R, "Non-polarised capacitor", Case=0402, Manufacturer=GENERIC, Manufacturer1 ComponentHeight=0.55mm, Manufacturer1 Example=PHYCOMP, Manufacturer1 Part Number=223858715623, Tolerance=±10%, Voltage=50V, Author="CERN DEM JLC", Component Type=Standard, CreateDate=03.12.2007, HelpURL=\\cern.ch\dfs\Applications\Altium\Datasheets\CC0402_X7R_PHYCOMP.pdf, LatestRevisionDate=03.12.2007, Manufacturer Part Number=CC0402_1NF_50V_10%_X7R, Mounted=Yes, Part Description="SMD Multilayer Chip Ceramic Capacitor", Part Number=CC0402_1NF_50V_10%_X7R, Pin Count=2, Sense=No, SMD=Yes, Socket=No, Status="Not Recommended", TC=X7R
D2: "VISHAY - BPW34 - Photodiode, 65 °, 2 nA, 900 nm, DIP-2", Breakdown Voltage=60V, Case/Package=DIP, Dark Current=2nA, Manufacturer=Vishay, Max Operating Temperature=100°C, Max Power Dissipation=215mW, Min Operating Temperature=-40°C, Package Quantity=3000, Supplier Part Number 1=751-1015-ND, Category=Photodiodes, ComponentLink1Description=https://datasheet.ciiva.com/1248/33605-1248690.pdf?src-supplier=Element14, ComponentLink1URL=https://datasheet.ciiva.com/1248/33605-1248690.pdf?src-supplier=Element14, ComponentLink2Description=https://datasheet.ciiva.com/1249/bpw34-1249073.pdf?src-supplier=Element14, ComponentLink2URL=https://datasheet.ciiva.com/1249/bpw34-1249073.pdf?src-supplier=Element14, ComponentLink3Description=https://datasheet.ciiva.com/25620/0900766b80de9fc5-25620357.pdf?src-supplier=RSComponents, ComponentLink3URL=https://datasheet.ciiva.com/25620/0900766b80de9fc5-25620357.pdf?src-supplier=RSComponents, ComponentLink4Description=https://datasheet.ciiva.com/4697/bpw34-79369-4697616.pdf?src-supplier=Mouser, ComponentLink4URL=https://datasheet.ciiva.com/4697/bpw34-79369-4697616.pdf?src-supplier=Mouser, ComponentLink5Description=https://datasheet.ciiva.com/1336/6514-1336219.pdf?src-supplier=Newark, ComponentLink5URL=https://datasheet.ciiva.com/1336/6514-1336219.pdf?src-supplier=Newark, ComponentLink6Description=https://datasheet.ciiva.com/4269/2bpw34-4269812.pdf?src-supplier=Arrow+Electronics, ComponentLink6URL=https://datasheet.ciiva.com/4269/2bpw34-4269812.pdf?src-supplier=Arrow+Electronics, ComponentLink7Description=https://datasheet.ciiva.com/15117/getdatasheetpartid-112064-15117125.pdf?src-supplier=Verical, ComponentLink7URL=https://datasheet.ciiva.com/15117/getdatasheetpartid-112064-15117125.pdf?src-supplier=Verical, ComponentLink8Description=https://datasheet.ciiva.com/1248/bpw34-1248686.pdf?src-supplier=Element14, ComponentLink8URL=https://datasheet.ciiva.com/1248/bpw34-1248686.pdf?src-supplier=Element14, ComponentLink9Description=https://datasheet.ciiva.com/1335/1809684-1335889.pdf?src-supplier=Newark, ComponentLink9URL=https://datasheet.ciiva.com/1335/1809684-1335889.pdf?src-supplier=Newark, ComponentLink10Description=https://datasheet.ciiva.com/2819/bpw34-2819744.pdf?src-supplier=Digi-Key, ComponentLink10URL=https://datasheet.ciiva.com/2819/bpw34-2819744.pdf?src-supplier=Digi-Key, ComponentLink11Description=https://datasheet.ciiva.com/8084/bpw34-8084840.pdf?src-supplier=Avnet, ComponentLink11URL=https://datasheet.ciiva.com/8084/bpw34-8084840.pdf?src-supplier=Avnet, Contact Plating=Tin, Diode Type=PIN, Fall Time=100ns, Height=2mm, Lead Free="Lead Free", Length=4.5mm, Lens Style=Clear, Manufacturer Part Number=BPW34, Max Reverse Voltage (DC)=60V, Mount="Through Hole,PCB", Number of Pins=2, Packaging=Bulk, Power Dissipation=215mW, Pricing 1="1=1,06000, 10=0,94400, 100=0,73630, 500=0,60822, 1000=0,48018, 2000=0,45300 (USD)", Radiation Hardening=No, REACH SVHC=Unknown, Reverse Breakdown Voltage=60V, Reverse Voltage (DC)=60V, Rise Time=100ns, RoHS=Yes, Stock 1=56, Supplier 1=Digi-Key, Viewing Angle=130°, Wavelength=900nm, Width=4.3mm
IC1 IC2 IC3: library part CMP-1310-00136-1, "Single Low-Voltage, Rail-to-Rail Operational Amplifier, 2.7 to 5.5 V, -40 to 85 degC, 5-Pin SC70, Pb-Free, Tape and Reel", Manufacturer="On Semiconductor", ComponentLink1Description="Manufacturer URL", ComponentLink1URL=http://www.onsemi.com/, ComponentLink2Description=Datasheet, ComponentLink2URL=http://www.onsemi.cn/pub_link/Collateral/LMV321-LMV358-LMV324-D.PDF, ComponentLink3Description="Package Specification", ComponentLink3URL=http://www.onsemi.cn/pub_link/Collateral/LMV821-D.PDF, DatasheetVersion="Rev. 10", GBW Typ (MHz)=1, Mounting Technology="Surface Mount", PackageDescription="5-Pin Small Outline Transistor, Body 2 x 1.25 mm, Pitch 0.65 mm", PackageReference=SC70-5-419A-02_K, PackageVersion="Rev. K, 07/2010", Packing="Tape and Reel", PartNumber=LMV321SQ3T2G, RoHS=TRUE, SR Typ (V/uS)=1, VCC Max (V)=5.5, VCC Min (V)=2.7
IC4: "1A, 0.8V to 5.0V Adjustable , Low Quiescent Current LDO Regulator", Case=SON8, Manufacturer="MICROCHIP TECHNOLOGY", Author="CERN DEM JLC", Bonding=No, Component Type=Standard, ComponentHeight=1mm, CreateDate=07.02.2012, Device=MCP1726-ADJE/MF, HelpURL=\\cern.ch\dfs\Applications\Altium\Datasheets\MCP1726-ADJE-MF.pdf, LatestRevisionDate=07.02.2012, Manufacturer Part Number=MCP1726-ADJE/MF, Mounted=Yes, PackageDescription="SON, 0.65mm pitch, 8 pin, 3mm X 3mm X 1.00mm H body (w/thermal tab 1.60 X 2.4mm),  IPC Medium Density", Part Description="1A, 0.8V to 5.0V Adjustable, Low Quiescent Current LDO Regulator", Part Number=MCP1726-ADJE/MF, Pin Count=8, PressFit=No, Sense=No, SMD=Yes, Socket=No
IC5: library part CMP-06313-000089-1, "IC EEPROM 2K I2C 1MHZ 8UDFN", Frequency=1MHz, Max Operating Temperature=85°C, Min Operating Temperature=-40°C, Access Time=550ns, Memory Size=2Kb, Memory Type=Non-Volatile, Mount="Surface Mount", Packaging="Cut Tape", RoHS Compliant=Yes
IC6: library part CMP-0384-01498-2, "Single Channel RRIO Operational Amplifier, 1 MHz BW, 920 mV/us SR, Industrial, 5-pin SOT23 (RJ-5), Reel", Amplifiers Per Package=1, Generic Part Number=AD8541, Input Bias Current=4pA, Input Offset Voltage=1mV, Manufacturer="Analog Devices", Code_JEDEC=MO-178-AA, ComponentLink1Description="Manufacturer URL", ComponentLink1URL=http://www.analog.com/en/index.html, ComponentLink2Description=Datasheet, ComponentLink2URL=http://www.analog.com/static/imported-files/data_sheets/AD8541_8542_8544.pdf, ComponentLink3Description="Package Specification", ComponentLink3URL=http://www.analog.com/static/imported-files/packages/PKG_PDF/SOT-23(RJ)/RJ_5.pdf, ComponentLink4Description="Reference Circuit", ComponentLink4URL=http://www.analog.com/en/all-operational-amplifiers-op-amps/operational-amplifiers-op-amps/ad8541/products/product.html#product-recommendations, DatasheetVersion="Rev. G", Iq/Amp=65uA, Mounting Technology="Surface Mount", PackageDescription="5-Pin Small Outline Transistor Package, Body 2.9 x 1.6 mm, Pitch 0.95 mm", PackageReference=RJ-5, PackageVersion=121608-A, PartNumber=AD8541ARTZ-REEL7, RevisionNote="Reference Circuit URL fixed", Slew Rate=920mV/us, Small Signal Bandwidth=1MHz, V Span Max=5.5V, V Span Min=2.7V
IC7 IC8: "IC MULTIPLEXER DUAL 4X1 16VQFN", Case/Package=VQFN, Max Operating Temperature=85°C, Max Supply Voltage=5.5V, Min Operating Temperature=-40°C, Min Supply Voltage=2V, Nominal Supply Current=20uA, On-State Resistance=100R, Package Quantity=3000, Bandwidth=50MHz, Lead Free="Lead Free", Logic Function=Multiplexer, Mount="Surface Mount", Number of Bits=4, Number of Channels=2, Number of Circuits=2, Number of Inputs=8, Number of Outputs=2, Number of Pins=16, Number of Switches=2, Operating Supply Current=20uA, Packaging="Tape and Reel", Polarity=Non-Inverting, Propagation Delay=12ns, Radiation Hardening=No, REACH SVHC="No SVHC", RoHS Compliant=Yes, Series=74LV, Supply Current=20uA, Supply Type=Single, Throw Configuration=SP4T, Turn-Off Delay Time=28ns, Turn-On Delay Time=28ns, Weight=0.001312oz
IC9: "SP Amp LOG Amp Single 5.5V 32-Pin LFCSP EP T/R", Case/Package="LFCSP EP", Input Offset Voltage (Vos)=600mV, Manufacturer="Analog Devices", Max Operating Temperature=85°C, Max Power Dissipation=600mW, Max Supply Voltage=5.5V, Min Operating Temperature=-40°C, Min Supply Voltage=4.5V, Operating Supply Current=20.8mA, Operating Supply Voltage=5V, Package Quantity=1, Supplier Part Number 1=ADL5304ACPZ-R7CT-ND, -3db Bandwidth=4MHz, Category="Amplifiers - Op Amps, Buffer, Instrumentation", ComponentLink1Description=https://datasheet.ciiva.com/1823/adl5304-1823090.pdf?src-supplier=Digi-Key, ComponentLink1URL=https://datasheet.ciiva.com/1823/adl5304-1823090.pdf?src-supplier=Digi-Key, ComponentLink2Description=https://datasheet.ciiva.com/1823/adl5304-1823091.pdf?src-supplier=Digi-Key, ComponentLink2URL=https://datasheet.ciiva.com/1823/adl5304-1823091.pdf?src-supplier=Digi-Key, ComponentLink3Description=https://datasheet.ciiva.com/2965/adl5304-2965478.pdf?src-supplier=Avnet, ComponentLink3URL=https://datasheet.ciiva.com/2965/adl5304-2965478.pdf?src-supplier=Avnet, ComponentLink4Description=https://datasheet.ciiva.com/46392/1501172-46392079.pdf?src-supplier=Element14, ComponentLink4URL=https://datasheet.ciiva.com/46392/1501172-46392079.pdf?src-supplier=Element14, ComponentLink5Description=https://datasheet.ciiva.com/1823/adl5304-1823092.pdf?src-supplier=Digi-Key, ComponentLink5URL=https://datasheet.ciiva.com/1823/adl5304-1823092.pdf?src-supplier=Digi-Key, ComponentLink6Description=https://datasheet.ciiva.com/17372/adl5304-17372079.pdf?src-supplier=Avnet+Europe, ComponentLink6URL=https://datasheet.ciiva.com/17372/adl5304-17372079.pdf?src-supplier=Avnet+Europe, Contact Plating=Tin,Matte, Lead Free="Contains Lead", Linearity=2%, Manufacturer Part Number=ADL5304ACPZ-R7, Mount="Surface Mount", Number of Amplifiers=3, Number of Channels=1, Number of Elements=3, Number of Pins=32, Packaging="Tape and Reel", Power Dissipation=600mW, Pricing 1="1=21,42000, 10=19,75500, 25=18,86680, 100=16,86930, 250=16,09240, 500=15,70500 (USD)", REACH SVHC="No SVHC", RoHS=Yes, RoHS Compliant=Yes, Series=-, Stock 1=3298, Supplier 1=Digi-Key
J1: library part MOLEX_52991-0208, "Connector 20 Female", Manufacturer=MOLEX, Manufacturer Part Number=52991-0208, Author="CERN DEM BC", Component Type=Standard, ComponentHeight=2.27mm, CreateDate=09.12.2019, Family=SlimStack™, HelpURL=\\cern.ch\dfs\Applications\Altium\Datasheets\MOLEX_52991-0208.pdf, LatestRevisionDate=09.12.2019, Mounted=Yes, Part Description="0.50mm Pitch SlimStack™ Dual Row 20 Circuits Surface Mount Vertical Receptacle (3.00 and 4.00mm Stacking Heights)", Part Number=MOLEX_52991-0208, Pin Count=20, PressFit=No, Sense=No, SMD=Yes, Socket=No, Status=None
L1 L2: library part IND0402_MURATA_BLM15HD601SN1, Case=0402, Manufacturer=MURATA, Manufacturer Part Number=BLM15HD601SN1D, Power=300mA, Resistance=0.85R, Tolerance=±25%, Author="CERN DEM JLC", Component Type=Standard, ComponentHeight=0.55mm, CreateDate=28.02.2012, HelpURL=\\cern.ch\dfs\Applications\Altium\Datasheets\IND0402_MURATA_BLM15H.pdf, LatestRevisionDate=25.10.2018, Mounted=Yes, Part Description="SMD EMIFIL Suppression Chip Ferrite Bead", Part Number=IND0402_MURATA_BLM15HD601SN1, Pin Count=2, Sense=No, SMD=Yes, Socket=No, Status=None
L3: library part CMP-06042-011728-1, "Wire Wound Ferrite Inductor for Power Lines 56μH ±20% 1.2Ω 500mA 1212"
R1 R2 R4 R5 R12: library part R0402_10K_1%_0.0625W_100PPM, "Resistor - 1%", Case=0402, Manufacturer=GENERIC, Manufacturer1 ComponentHeight=0.4mm, Manufacturer1 Example="YAGEO PHYCOMP", Manufacturer1 Part Number=232270671003L, Power=0.0625W, Tolerance=±0.1%, Author="CERN DEM JLC", Component Type=Standard, CreateDate=03.12.2007, HelpURL=\\cern.ch\dfs\Applications\Altium\Datasheets\R0402_Phycomp_RC0402.pdf, LatestRevisionDate=17.10.2012, Manufacturer Part Number=R0402_10K_1%_0.0625W_100PPM, Mounted=Yes, Part Description="General Purpose Thick Film Chip Resistor", Part Number=R0402_10K_1%_0.0625W_100PPM, Pin Count=2, PressFit=No, Sense=No, SMD=Yes, Socket=No, Status="Not Recommended", TC=±100ppm/°C
R3: library part R0402_4R02_1%_0.063W_100PPM, "Resistor - 1%", Case=0402, Manufacturer=GENERIC, Manufacturer1 ComponentHeight=0.4mm, Manufacturer1 Example=VISHAY, Manufacturer1 Part Number=CRCW04024R02FK, Power=0.063W, Tolerance=±1%, Author="CERN DEM BC", Component Type=Standard, CreateDate=18.11.2020, HelpURL="\\cern.ch\dfs\Applications\Altium\Datasheets\R0402_VISHAY_CRCW e3.pdf", LatestRevisionDate=18.11.2020, Manufacturer Part Number=R0402_4R02_1%_0.063W_100PPM, Mounted=Yes, Part Description="General Purpose Thick Film Chip Resistor", Part Number=R0402_4R02_1%_0.063W_100PPM, Pin Count=2, PressFit=No, Sense=No, SMD=Yes, Socket=No, Status=None, TC=±100ppm/°C
R6 R7: library part R0402_1K_1%_0.0625W_100PPM, "Resistor - 1%", Case=0402, Manufacturer=GENERIC, Manufacturer1 ComponentHeight=0.4mm, Manufacturer1 Example="YAGEO PHYCOMP", Manufacturer1 Part Number=232270671002L, Power=0.0625W, Tolerance=±1%, Author="CERN DEM JLC", Component Type=Standard, CreateDate=03.12.2007, HelpURL=\\cern.ch\dfs\Applications\Altium\Datasheets\R0402_Phycomp_RC0402.pdf, LatestRevisionDate=17.10.2012, Manufacturer Part Number=R0402_1K_1%_0.0625W_100PPM, Mounted=Yes, Part Description="General Purpose Thick Film Chip Resistor", Part Number=R0402_1K_1%_0.0625W_100PPM, Pin Count=2, PressFit=No, Sense=No, SMD=Yes, Socket=No, Status="Not Recommended", TC=±100ppm/°C
R8: library part R0402_49R9_1%_0.0625W_100PPM, "Resistor - 1%", Case=0402, Manufacturer=GENERIC, Manufacturer1 ComponentHeight=0.4mm, Manufacturer1 Example="YAGEO PHYCOMP", Manufacturer1 Part Number="232270674999L or RC0402FR-0749R9L", Power=0.0625W, Tolerance=±1%, Author="CERN DEM JLC", Component Type=Standard, CreateDate=24.10.2012, HelpURL=\\cern.ch\dfs\Applications\Altium\Datasheets\R0402_Phycomp_RC0402.pdf, LatestRevisionDate=24.10.2012, Manufacturer Part Number=R0402_49R9_1%_0.0625W_100PPM, Mounted=Yes, Part Description="General Purpose Thick Film Chip Resistor", Part Number=R0402_49R9_1%_0.0625W_100PPM, Pin Count=2, PressFit=No, Sense=No, SMD=Yes, Socket=No, Status="Not Recommended", TC=±100ppm/°C
R9 R10 R11 R13 R16 R18: library part R0402_0R_JUMPER, "Resistor", Case=0402, Manufacturer=GENERIC, Manufacturer1 ComponentHeight=0.4mm, Manufacturer1 Example="YAGEO PHYCOMP", Manufacturer1 Part Number=232270591001L, Author="CERN DEM JLC", Component Type=Standard, CreateDate=03.12.2007, HelpURL=\\cern.ch\dfs\Applications\Altium\Datasheets\R0402_Phycomp_RC0402.pdf, LatestRevisionDate=17.10.2012, Manufacturer Part Number=R0402_0R_JUMPER, Mounted=Yes, Part Description="1A (0.05R Max DC Resistance) Zero Ohm Jumper", Part Number=R0402_0R_JUMPER, Pin Count=2, PressFit=No, Sense=No, SMD=Yes, Socket=No, Status="Not Recommended"
R14 R15 R24: library part R0402_470R_1%_0.0625W_100PPM, "Resistor - 1%", Case=0402, Manufacturer=GENERIC, Manufacturer1 ComponentHeight=0.4mm, Manufacturer1 Example="YAGEO PHYCOMP", Manufacturer1 Part Number=232270674701L, Power=0.0625W, Tolerance=±1%, Author="CERN DEM JLC", Component Type=Standard, CreateDate=03.12.2007, HelpURL=\\cern.ch\dfs\Applications\Altium\Datasheets\R0402_Phycomp_RC0402.pdf, LatestRevisionDate=17.10.2012, Manufacturer Part Number=R0402_470R_1%_0.0625W_100PPM, Mounted=Yes, Part Description="General Purpose Thick Film Chip Resistor", Part Number=R0402_470R_1%_0.0625W_100PPM, Pin Count=2, PressFit=No, Sense=No, SMD=Yes, Socket=No, Status="Not Recommended", TC=±100ppm/°C
R17 R19 R25: library part R0402_10K_1%_0.0625W_100PPM, "Resistor - 1%", Case=0402, Manufacturer=GENERIC, Manufacturer1 ComponentHeight=0.4mm, Manufacturer1 Example="YAGEO PHYCOMP", Manufacturer1 Part Number=232270671003L, Power=0.0625W, Tolerance=±1%, Author="CERN DEM JLC", Component Type=Standard, CreateDate=03.12.2007, HelpURL=\\cern.ch\dfs\Applications\Altium\Datasheets\R0402_Phycomp_RC0402.pdf, LatestRevisionDate=17.10.2012, Manufacturer Part Number=R0402_10K_1%_0.0625W_100PPM, Mounted=Yes, Part Description="General Purpose Thick Film Chip Resistor", Part Number=R0402_10K_1%_0.0625W_100PPM, Pin Count=2, PressFit=No, Sense=No, SMD=Yes, Socket=No, Status="Not Recommended", TC=±100ppm/°C
R20 R22 R23: library part R0402_10K_0.1%_0.063W_25PPM, "Resistor - 0.1%", Case=0402, Manufacturer=GENERIC, Manufacturer1 ComponentHeight=0.35mm, Manufacturer1 Example="TE CONNECTIVITY", Manufacturer1 Part Number=CPF0402B10KE1, Power=0.063W, Tolerance=±0.1%, Author="CERN DEM JMW", Component Type=Standard, CreateDate=22.09.2015, HelpURL=\\cern.ch\dfs\Applications\Altium\Datasheets\R0402_TYCO_CPF.pdf, LatestRevisionDate=22.09.2015, Manufacturer Part Number=R0402_10K_0.1%_0.063W_25PPM, Mounted=Yes, Part Description="Thin Film Precision Resistor", Part Number=R0402_10K_0.1%_0.063W_25PPM, Pin Count=2, PressFit=No, Sense=No, SMD=Yes, Socket=No, Status="Not Recommended", TC=±25ppm/°C
R21: library part R0402_33K2_0.1%_0.063W_25PPM, "Resistor - 0.1%", Case=0402, Manufacturer=GENERIC, Manufacturer1 ComponentHeight=0.4mm, Manufacturer1 Example=PANASONIC, Manufacturer1 Part Number=ERA2AEB3322X, Power=0.063W, Tolerance=±0.1%, Voltage=50V, Author="CERN DEM BC", Component Type=Standard, CreateDate=09.07.2020, HelpURL=\\cern.ch\dfs\Applications\Altium\Datasheets\R0402_PANASONIC_ERA.pdf, LatestRevisionDate=09.07.2020, Manufacturer Part Number=R0402_33K2_0.1%_0.063W_25PPM, Mounted=Yes, Part Description="Thin Film Precision Resistor", Part Number=R0402_33K2_0.1%_0.063W_25PPM, Pin Count=2, PressFit=No, Sense=No, SMD=Yes, Socket=No, Status="Not Recommended", TC=±25ppm/°C
R26: library part R0402_11K5_1%_0.063W_100PPM, "Resistor - 1%", Case=0402, Manufacturer=GENERIC, Manufacturer1 ComponentHeight=0.4mm, Manufacturer1 Example=VISHAY, Manufacturer1 Part Number=CRCW040211K5FK, Power=0.063W, Tolerance=±1%, Author="CERN DEM BC", Component Type=Standard, CreateDate=02.06.2020, HelpURL="\\cern.ch\dfs\Applications\Altium\Datasheets\R0402_VISHAY_CRCW e3.pdf", LatestRevisionDate=02.06.2020, Manufacturer Part Number=R0402_11K5_1%_0.063W_100PPM, Mounted=Yes, Part Description="Standard Thick Film Chip Resistor", Part Number=R0402_11K5_1%_0.063W_100PPM, Pin Count=2, PressFit=No, Sense=No, SMD=Yes, Socket=No, Status=None, TC=±100ppm/°C
R27: library part R0402_1K1_1%_0.0625W_100PPM, "Resistor - 1%", Case=0402, Manufacturer=GENERIC, Manufacturer1 ComponentHeight=0.4mm, Manufacturer1 Example="YAGEO PHYCOMP", Manufacturer1 Part Number=232270671102L, Power=0.0625W, Tolerance=±1%, Author="CERN DEM JLC", Component Type=Standard, CreateDate=03.12.2007, HelpURL=\\cern.ch\dfs\Applications\Altium\Datasheets\R0402_Phycomp_RC0402.pdf, LatestRevisionDate=17.10.2012, Manufacturer Part Number=R0402_1K1_1%_0.0625W_100PPM, Mounted=Yes, Part Description="General Purpose Thick Film Chip Resistor", Part Number=R0402_1K1_1%_0.0625W_100PPM, Pin Count=2, PressFit=No, Sense=No, SMD=Yes, Socket=No, Status="Not Recommended", TC=±100ppm/°C

## Via types
v1: diameter 0.5, hole 0.25, Top Layer to Bottom Layer, tented both sides, 88 vias
v2: diameter 0.6, hole 0.3, Top Layer to Bottom Layer, 10 vias
v3: diameter 0.5, hole 0.2, Top Layer to Bottom Layer, tented both sides, 4 vias

## Nets (pads, with @x,y where several pads share a name; then routed paths per layer and width w, separated by ;. In a path a pad name is that pad's centre, name@x,y a point inside that pad or via, vN(x,y) a via of type N, cw(c..) or ccw(c..) an arc to the next point about the centre after c; other vN are vias at no path point)
CAL_DIV_OUT: IC3.1 IC7.3 R12.2 | length 6.3
  Top Layer w0.203: R12.2 14.008,22.377 14.91,22.377 16.52,20.767 IC3.1 16.52,19.187 16.061,18.728 IC7.3
DAC_PD_BIAS: C19.2 IC2.1 R15.2 | length 7.1
  Top Layer w0.127: 10.569,12.397 10.749,12.217 12.624,12.217
  Top Layer w0.203: IC2.1 8.714,13.401 9.191,12.924 9.44,12.675 10.291,12.675 10.569,12.397 ; 12.624,12.217 13.368,12.217 C19.2 13.545,12.395 R15.2
GND: C3.1 C5.1 C6.2 C7.2 C9.1 C10.1 C11.1 C12.1 C13.1 C14.1 C15.1 C16.1 C17.1 C18.1 C19.1 C20.1 C21.1 C22.1 C23.1 C25.1 IC1.2 IC2.2 IC3.2 IC4.4 IC4.9 IC5.1 IC5.2 IC5.3 IC5.4 IC5.7 IC5.9 IC6.2 IC6.3 IC7.1 IC7.2 IC7.4 IC7.5 IC7.6 IC7.7 IC7.8 IC7.17 IC8.1 IC8.2 IC8.4 IC8.5 IC8.6 IC8.7 IC8.8 IC8.17 IC9.11 IC9.13 IC9.15 IC9.18 J1.12 J1.16 J1.19 J1.20 R6.2 R7.2 R19.1 R22.1 R23.1 R27.2 | length 57
  Top Layer w0.203: v1(9.017,13.818) 9.299,13.536 9.299,13.283 9.562,13.02 10.413,13.02 10.492,12.941 10.942,12.941 C16.1
  Top Layer w0.254: C17.1@6.622,4.699 C17.1 ; v1(9.017,11.405) 9.017,11.338 9.071,11.284 9.071,10.605 IC9.18 ; v1(9.55,7.391) 9.56,7.401 10.271,7.401 IC9.11 ; v1(9.55,9.398) 9.554,9.401 10.271,9.401 IC9.15 ; v1(9.563,8.382) 9.583,8.401 10.271,8.401 IC9.13 ; v1(12.929,11.735) 12.995,11.735 13.059,11.671 13.355,11.671 C19.1 ; IC7.8 IC7.17@14.367,20.731 ; v1(14.91,23.698) 14.913,23.695 14.913,23.067 C15.1 ; v1(15.291,17.221) 15.258,17.221 C11.1 14.367,16.487 IC7.1 14.367,18.227 IC7.17@14.367,18.478 ; IC7.2 14.363,18.227 14.363,18.731 IC7.17 v2(14.117,19.978) ; IC7.4 14.367,19.228 v2(14.117,18.978) ; IC7.5 14.367,19.728 v2(14.117,19.978) ; IC7.6 IC7.17@14.367,20.228 ; IC7.7 15.623,20.731 IC7.17@14.367,20.731 ; IC3.2 v1(17.17,20.828) ; J1.16 17.306,15.934 18.458,15.934 v1(18.466,15.926) ; J1.20 17.306,16.938 18.462,16.938 v1(18.466,16.942) ; J1.12 v1(18.466,14.935) ; v1(19.837,20.498) 19.856,20.479 19.856,19.806 R23.1 ; J1.19 21.306,16.938 22.551,16.938 v1(22.555,16.942) ; v2(14.117,18.978) 14.117,18.728 IC7.17@14.367,18.478 ; v2(14.117,18.978) 14.367,18.728 IC7.17@14.367,18.478 ; v2(14.117,19.978) IC7.17@14.367,20.228 ; v2(14.117,19.978) 14.117,20.228 IC7.17@14.367,20.478 ; IC7.17@14.367,20.228 IC7.17@14.367,20.478 ; IC7.17@14.367,20.478 IC7.17@14.367,20.731
  Top Layer w0.305: 2.092,14.292 IC8.4 3.367,14.292 v2(3.617,14.542) ; IC8.7 3.198,12.792 3.244,12.839 3.244,12.92 3.277,12.952 3.367,12.952 3.367,12.92 IC8.8 ; IC8.6 IC8.17@3.367,13.292 ; IC8.5 3.367,13.792 v2(3.617,13.542) ; C7.2 2.007,9.599 2.007,8.077 v1(2.388,7.696) ; 2.385,7.948 3.02,8.583 3.13,8.583 C5.1 ; IC8.2 3.24,15.292 3.342,15.19 3.367,15.19 IC8.1 ; C12.1 2.898,17.328 2.898,17.587 2.844,17.641 2.844,17.857 v1(2.819,17.882) 2.872,17.882 2.95,17.96 3.398,17.96 C14.1 ; C6.2 4.322,5.693 4.322,5.127 v1(4.369,5.08) ; v1(5.918,18.999) IC1.2 ; v1(5.994,4.699) C17.1@6.622,4.699 ; v1(7.569,18.491) 7.597,18.519 7.597,18.968 7.745,19.116 IC6.3 ; IC2.2 7.994,12.748 8.689,12.748 v1(8.712,12.725) ; IC6.2 8.007,20.053 8.852,20.053 v1(8.865,20.041) ; R22.1 8.592,22.269 8.592,22.917 v1(8.611,22.936) ; v1(9.804,22.911) 9.808,22.907 9.808,22.254 C13.1 ; v1(15.138,13.081) 15.176,13.118 15.176,13.227 C20.1 ; C18.1 15.626,15.608 15.835,15.608 15.924,15.697 v1(15.977,15.697) ; IC8.17@3.367,13.292 3.367,13.042 3.617,13.292 v2(3.617,13.542) ; IC8.17@3.367,13.292 v2(3.617,13.542) ; v2(3.617,14.542) 3.617,14.792 3.367,15.042 3.367,14.792 v2(3.617,14.542)
  Bottom Layer w0.254: v1(18.466,14.935) 18.466,14.3 17.907,13.741 17.907,13.056 18.733,12.23 R19.1
  other v1: 12.903,4.801 13.589,5.182 13.614,5.817 13.614,6.452 19.431,6.579 19.99,6.579 17.755,10.262 16.078,10.287 16.916,10.287
  other v2: 9.6,3.1 9.6,4.1 4.617,13.542 4.617,14.542 13.117,18.978 13.117,19.978
LOG_OUTPUT: IC9.21 IC9.22 R16.1 | length 10.4
  Top Layer w0.203: R16.1 4.94,17.15 5.607,16.483 v1(5.613,16.483) ; v1(5.283,11.151) 5.295,11.162 5.65,11.162 5.867,11.379 7.125,11.379 ; IC9.22@7.05,10.627 IC9.22 7.073,11.328 7.125,11.379 ; IC9.21 7.55,10.627 7.55,11.246 7.417,11.379 7.125,11.379
  Inner Layer 2 w0.203: v1(5.283,11.151) 5.283,11.838 5.156,11.965 5.156,12.573 5.309,12.725 5.309,16.098 5.613,16.403 v1(5.613,16.483)
NetC1_1: C1.1 C2.1 C4.1 C8.1 IC6.4 R1.1 R2.1 R4.1 R5.1 R9.2 | length 11.7
  Top Layer w0.203: R1.1 R5.1 R4.1 R2.1 8.011,17.791 8.011,17.951 8.349,18.288 10.135,18.288 10.135,18.964 IC6.4@10.395,18.964 ; 10.1,18.288 10.44,17.948 10.44,17.811 C2.1 C4.1 ; C1.1 C8.1 C4.1 ; R9.2 11.417,16.586 C4.1
NetC1_2: C1.2 IC7.11 IC8.11 R1.2 | length 15.3
  Top Layer w0.203: IC8.11 6.342,13.292 6.503,13.131 6.878,13.131 6.927,13.082 v1(6.927,13.066) ; v1(9.246,14.554) C1.2 ; v1(11.529,21.297) 11.227,20.995 11.227,20.497 11.496,20.228 IC7.11
  Inner Layer 2 w0.203: v1(6.927,13.066) 8.416,14.554 v1(9.246,14.554) 9.957,14.554 12.522,17.12 12.522,18.796 11.529,19.789 v1(11.529,21.297)
NetC2_2: C2.2 IC7.15 IC8.15 R2.2 | length 7.5
  Top Layer w0.203: IC8.15 6.282,15.457 6.581,15.457 v1(6.643,15.519) ; v1(9.246,17.602) C2.2 ; v1(11.374,17.595) 11.617,17.838 IC7.15
  Inner Layer 2 w0.203: v1(6.643,15.519) 8.726,17.602 v1(9.246,17.602) 9.252,17.595 v1(11.374,17.595)
NetC3_2: C3.2 IC9.17 | length 3.7
  Top Layer w0.203: IC9.17 10.644,10.603 11.797,9.451 11.797,8.729 C3.2
NetC4_2: C4.2 IC7.14 IC8.14 R4.2 | length 10.1
  Top Layer w0.203: IC8.14 v1(6.65,14.792) ; v1(9.246,16.586) C4.2 ; v1(10.861,18.361) 11.228,18.728 IC7.14
  Inner Layer 2 w0.203: v1(6.65,14.792) 7.091,14.792 7.807,15.508 7.807,15.834 8.56,16.586 11.055,16.586 11.862,17.393 11.862,17.869 11.37,18.361 v1(10.861,18.361)
NetC5_2: C5.2 IC9.29 L1.1 | length 2.6
  Top Layer w0.127: C5.2 4.434,8.494 4.688,8.24 4.688,8.14 4.862,7.965 5.312,7.965 IC9.29
  Top Layer w0.203: C5.2@4.197,8.75 L1.1
NetC6_1: C6.1 IC9.2 IC9.3 IC9.7 IC9.8 IC9.24 IC9.26 IC9.27 IC9.33 R8.2 | length 21.5
  Top Layer w0.203: IC9.27 7.073,8.903 IC9.33@6.782,9.195 ; IC9.26 6.04,9.403 6.135,9.308 IC9.33@6.576,9.308 ; IC9.24 6.097,10.58 6.097,10.11 6.576,9.631 6.576,9.402 6.669,9.309 IC9.33@6.782,9.195 ; IC9.2 6.575,5.705 6.575,6.415 6.576,6.416 6.576,6.906 IC9.33@7.073,7.403 ; IC9.3 IC9.33@7.073,7.403 ; IC9.33@7.159,8.818 v3(7.273,8.703) IC9.33@7.388,8.588 ; v3(7.273,7.603) IC9.33@7.073,7.403 ; IC9.33 IC9.33@7.388,8.588 ; v3(8.373,7.603) IC9.33@9.073,6.903 ; IC9.7 IC9.33@9.073,6.903 ; IC9.8 9.573,6.708 9.378,6.903 IC9.33@9.073,6.903 ; IC9.33@6.782,9.195 7.074,8.904 7.159,8.818 7.388,8.818 IC9.33@7.388,8.588
  Top Layer w0.305: R8.2 3.267,7.647 3.729,7.186 ; v1(3.278,6.43) 3.315,6.467 3.315,6.771 3.729,7.186 ; C6.1 3.729,7.186
  Bottom Layer w0.305: v1@3.28,6.428 v1(3.278,6.43) 6.1,6.43 v3(7.273,7.603)
  other v3: 8.373,8.703
NetC7_1: C7.1 R3.1 | length 1
  Top Layer w0.203: C7.1 3.26,10.765 R3.1
NetC8_2: C8.2 IC7.12 IC8.12 R5.2 | length 13.7
  Top Layer w0.203: IC8.12 6.635,13.792 6.643,13.783 v1(6.643,13.735) ; v1(9.246,15.57) C8.2 ; v1(10.518,20.289) 10.528,20.279 10.952,20.279 11.503,19.728 IC7.12
  Inner Layer 2 w0.203: v1(6.643,13.735) 8.479,15.57 10.506,15.57 12.192,17.256 12.192,18.615 v1(10.518,20.289)
NetC9_2: C9.2 IC9.9 IC9.10 | length 4.3
  Top Layer w0.203: IC9.9 IC9.9@10.394,6.403 ; IC9.10 10.297,6.88 10.645,6.88 10.764,6.761 10.764,6.546 10.645,6.427 10.417,6.427 IC9.9@10.394,6.403 ; C9.2 11.896,4.218 11.896,4.614 10.417,6.093 10.417,6.38 IC9.9@10.394,6.403
NetC10_2: C10.2 IC9.16 | length 3.4
  Top Layer w0.203: IC9.16 10.737,9.903 11.408,9.231 11.408,8.167 11.408,8.149 11.996,7.561 C10.2
NetC18_2: C18.2 J1.18 R14.2 | length 3.3
  Top Layer w0.203: R14.2 14.473,15.354 14.661,15.543 14.661,15.604 15.199,16.142 15.26,16.142 15.554,16.436 J1.18
NetC20_2: C20.2 J1.14 R24.2 | length 3.5
  Top Layer w0.203: R24.2 14.654,13.6 14.654,13.662 15.203,14.212 C20.2@15.26,14.212 ; C20.2 15.469,14.491 16.39,15.413 17.281,15.413 J1.14
NetC21_2: C21.2 C22.2 IC4.1 IC4.2 L3.2 R25.1
NetC25_2: C25.2 IC4.6 | length 2.9
  Top Layer w0.203: C25.2 13.582,2.416 14.786,2.416 14.915,2.545 IC4.6
NetD1_A: D1.A D2.A R11.1 R13.1 | length 8.4
  Top Layer w0.203: R13.1 12.7,11.087 D2.A 13.341,10.541 R11.1
  Bottom Layer w0.203: D1.A 9.85,11.675 11.625,9.9 D2.A
NetD1_C: D1.C D2.C R9.1 R10.1 | length 6.3
  Top Layer w0.203: R10.1 12.192,14.492 D2.C 12.535,15.165 R9.1@12.535,16.358
  Bottom Layer w0.203: D2.C 13.308,14.392 13.616,14.392 13.629,14.38 13.975,14.38 14.33,14.025 D1.C
NetIC1_1: IC1.1 R16.2 R18.2 | length 2.2
  Top Layer w0.203: R16.2 6.825,17.17 6.838,17.183 6.65,17.372 6.65,17.479 6.638,17.491 IC1.1
NetIC1_3: IC1.3 R20.1 R22.2 | length 3
  Top Layer w0.203: IC1.3 6.638,20.748 R20.1 6.731,20.841 6.731,21.324 7.424,22.017 7.444,22.017 7.633,22.205 R22.2@7.633,22.225
NetIC1_4: IC1.4 R14.1 R20.2 | length 15.8
  Top Layer w0.203: IC1.4 5.298,19.649 5.778,20.129 R20.2 5.926,20.976 5.926,21.305 v1(6.207,21.586) ; v1(13.827,14.858) 13.884,14.801 14.046,14.801 14.433,14.414 R14.1
  Inner Layer 2 w0.203: v1(13.827,14.858) v1(13.827,17.517)
  Bottom Layer w0.203: v1(6.207,21.586) 8.438,19.355 11.278,19.355 13.116,17.517 v1(13.827,17.517)
NetIC3_3: IC3.3 R21.1 R23.2 | length 2.1
  Top Layer w0.203: IC3.3 18.246,19.955 18.415,19.787 R23.2 18.948,19.799 R21.1
NetIC3_4: IC3.4 R21.2 R24.1 | length 20.3
  Top Layer w0.203: v1(12.879,13.411) R24.1 ; v1(17.009,11.858) 18.792,11.858 19.71,12.776 19.71,17.805 20.904,18.999 20.904,20.244 19.71,21.438 19.431,21.438 19.429,21.44 19.117,21.44 18.74,21.817 18.74,21.837 18.571,22.005 IC3.4
  Inner Layer 2 w0.203: v1(12.879,13.411) 13.513,13.411 15.066,11.858 v1(17.009,11.858)
NetIC4_3: IC4.3 R25.2 | length 1.8
  Top Layer w0.203: R25.2 13.908,7.377 14.915,6.37 IC4.3
NetIC4_7: IC4.7 R26.1 R27.1 | length 6.2
  Top Layer w0.203: R27.1 15.57,2.086 ; IC4.7 15.565,2.091 15.57,2.086 ; R26.1 16.464,2.086 15.57,2.086
NetIC5_5: IC5.5 J1.11 | length 28.3